# EAGLE board MA_board_2 (EAGLE 9.4.2)
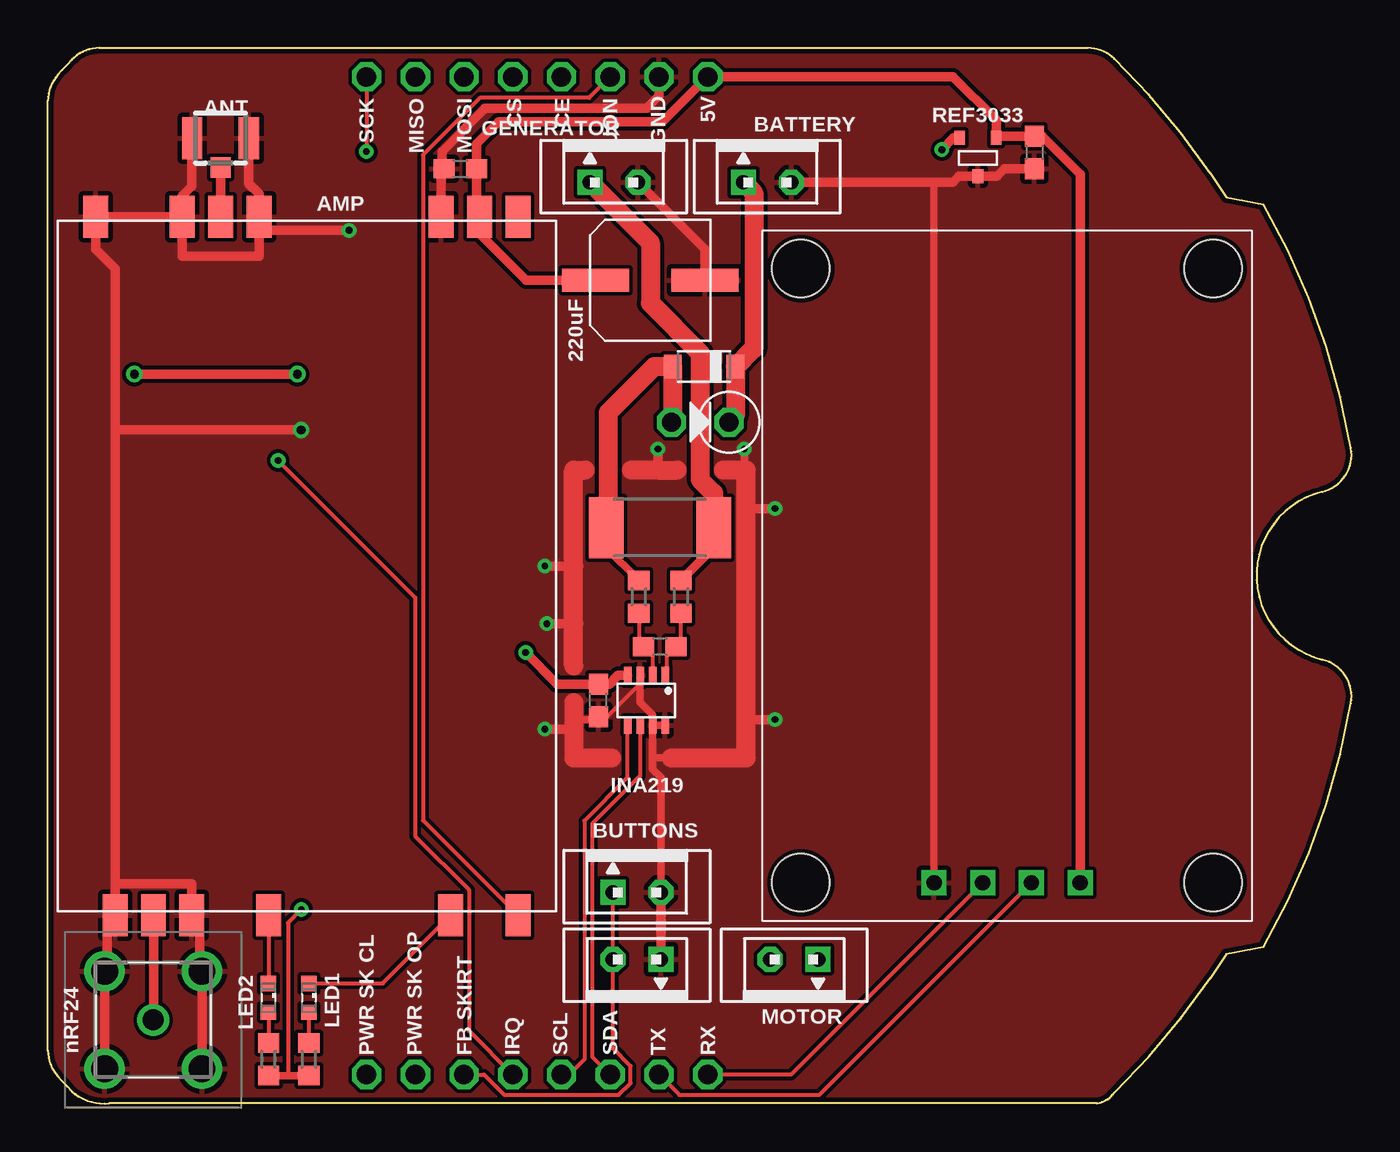
[diagram p0: board, top side]
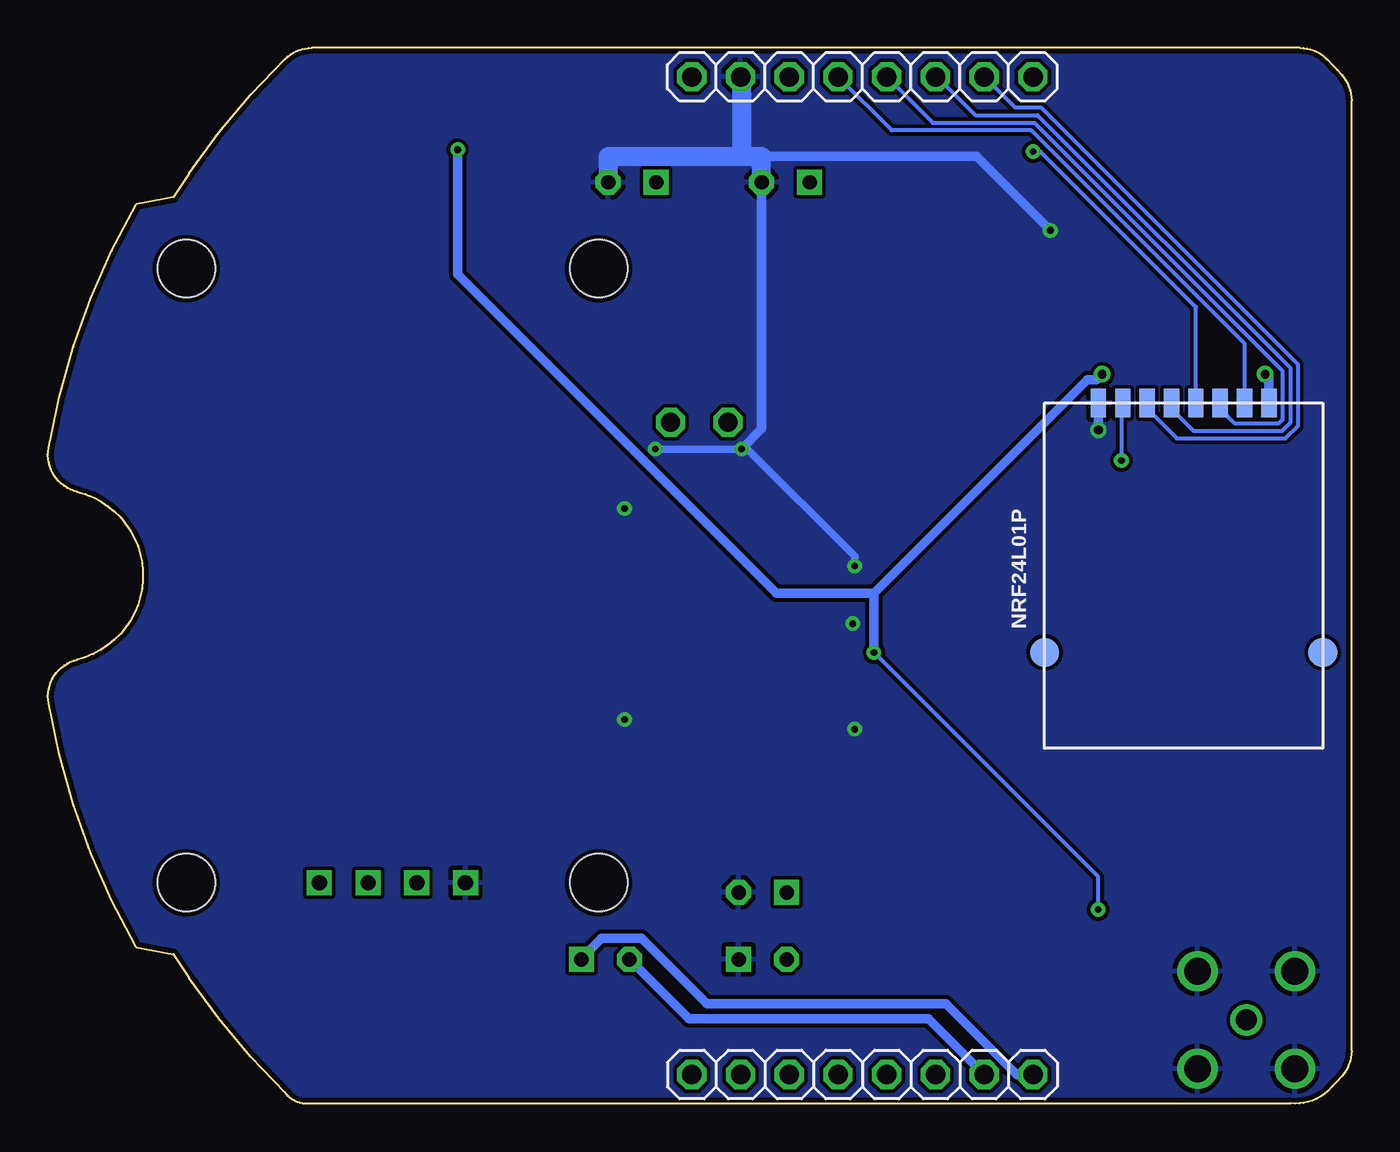
[diagram p1: board, bottom side, seen from below]

Size 67.96 x 55.01 mm. Coordinates in mm from the lower left corner, seen from the top.
Outline: 0,2.76 0,52.27 arc-42 0.51,53.6 arc-2 1.24,54.39 arc-46 2.69,55.01 54.2,55.01 arc-44 55.59,54.45 arc-12 60.59,48.48 61.43,47.24 63.36,46.86 arc-20 67.93,34.17 arc-86 66.43,31.88 arc153 66.43,23.14 arc-86 67.93,20.86 arc-20 63.36,8.16 61.43,7.79 60.59,6.54 arc-12 55.59,0.58 arc-44 54.7,0.01 3.19,0.01 arc-46 1.24,0.63 arc-2 0.51,1.42 arc-42 0,2.76
Copper layers (1*16): Top 0.035mm / dielectric 1.5mm / Bottom 0.035mm
Design rules "default *": minimum track width 0.2mm, minimum drill 0.35mm, track to track 0.2mm, track to pad 0.2mm, pad to pad 0.2mm, via to via 0.2mm, smd to smd 0.2mm, copper to edge 0.25mm, drill to drill 0.2mm, minimum pad ring 10mil, minimum via ring 8mil, stop-mask expansion 4mil, vias tented up to drill 0mil, thermal gap 10mil

## Footprints (pad centres in the part's own frame; a part is rotated, then mirrored left to right if it is on the bottom)
XQ-02A = smd 2.2 x 1.3: P$1 -18.2,-11; P$2 -18.2,-6.5; P$3 -18.2,-4.5; P$4 -18.2,-2.5; P$5 -18.2,9; P$6 -18.2,11; P$7 18.2,11; P$8 18.2,7.5; P$9 18.2,-2; P$10 18.2,-6; P$11 18.2,-8; P$12 18.2,-10; P$13 -18.2,7
B2B-PH-K-S = drill 0.75 pad 1.3 square: 1 1.25,0 | drill 0.75 pad 1.3 octagon: 2 -1.25,0
C0603 = smd 1.1 x 1: 1 -0.85,0; 2 0.85,0
ECAP220-CMD = smd 1.2 x 3.5: P$1 0,2.85; P$2 0,-2.85
SOD123 = smd 0.91 x 1.22: A 1.635,0; C -1.635,0
BA159 = drill 1 octagon: P$1 -1.5,0; P$2 1.5,0
SOT23-8 = smd 0.9 x 0.4: 1 -1.3,0.975; 2 -1.3,0.325; 3 -1.3,-0.325; 4 -1.3,-0.975; 5 1.3,-0.975; 6 1.3,-0.325; 7 1.3,0.325; 8 1.3,0.975
MCXJPHSTTH1 = drill 1.1 pad 1.65: 1 0,0 | drill 1.4 pad 2.1: 2 -2.54,2.54; 3 -2.54,-2.54; 4 2.54,-2.54; 5 2.54,2.54
U.FL-R-SMT-1(10) = smd 1.05 x 2.2: 1 -1.475,0; 2 1.475,0 | smd 1.05 x 1.05: 3 0,1.525
1X08 = drill 1.016 pad 1.524 octagon: 1 -8.89,0; 2 -6.35,0; 3 -3.81,0; 4 -1.27,0; 5 1.27,0; 6 3.81,0; 7 6.35,0; 8 8.89,0
SML0603 = smd 0.8 x 0.8: A 0.75,0; C -0.75,0
NRF24L01_ML01SP4 = smd 1.5 x 0.8: P$1 -9,4.445; P$2 -9,3.175; P$3 -9,1.905; P$4 -9,0.635; P$5 -9,-0.635; P$6 -9,-1.905; P$7 -9,-3.175; P$8 -9,-4.445 | smd 1.5 x 1.5: P$9 4,7.25; P$10 4,-7.25
R0603 = smd 1 x 1.1: 1 -0.85,0; 2 0.85,0
R2512 = smd 1.8 x 3.2: 1 -2.8,0; 2 2.8,0
SOT23-3 = smd 0.56 x 0.73: 1 -0.95,-1; 2 0.95,-1; 3 0,1
GPS = drill 0.8 square: GND -16,3.81; RX -16,-1.27; TX -16,1.27; UCC -16,-3.81 | hole 3: 16,10.75; -16,10.75; -16,-10.75; 16,-10.75

## Placement (x,y rotation side)
AMP  XQ-02A  [XQ-02A]  13.5,28.01 270 top
BATTERY  JST-2-K-S  [B2B-PH-K-S]  37.5,48.01 180 top
BUTTON-OP  JST-2-K-S  [B2B-PH-K-S]  30.7,7.51 0 top
BUTTONS  JST-2-K-S  [B2B-PH-K-S]  30.7,11.01 180 top
C1  100nF  [C0603]  51.42,49.56 270 top
C2  100nF  [C0603]  31.9,23.81 180 top
C3  100nF  [C0603]  28.7,21.01 90 top
C4  220uF  [ECAP220-CMD]  31.4,42.91 90 top
C6  100nF  [C0603]  21.5,48.71 0 top
D1  D-MBR  [SOD123]  34.2,38.41 180 top
DIP-4A  BA159  [BA159]  34,35.51 0 top
GENERATOR  JST-2-K-S  [B2B-PH-K-S]  29.5,48.01 180 top
INA219  INA219AID  [SOT23-8]  31.2,21.01 270 top
J1  MCX-J-P-H-ST-TH1  [MCXJPHSTTH1]  5.49,4.36 0 top
J2  U.FL-R-SMT-1_10_  [U.FL-R-SMT-1(10)]  9,50.31 180 top
JP1  [1X08]  25.5,53.51 180 bottom
JP2  [1X08]  25.5,1.51 0 bottom
LED1  [SML0603]  13.6,5.51 270 top
LED2  [SML0603]  11.5,5.51 270 top
MOTOR  JST-2-K-S  [B2B-PH-K-S]  38.9,7.51 0 top
NRF24L01P  NRF24L01_ML01SP4  [NRF24L01_ML01SP4]  8.75,27.51 270 bottom
R1  100R  [R0603]  33,26.41 270 top
R2  100R  [R0603]  30.8,26.41 270 top
R3  R05  [R2512]  31.9,30.01 180 top
R4  2k  [R0603]  13.6,2.31 270 top
R5  2k  [R0603]  11.5,2.31 270 top
REF3033  REF3033  [SOT23-3]  48.48,49.32 180 top
U$5  GPS  [GPS]  50,27.51 90 top

## Library data of the parts
AMP BATTERY BUTTON-OP BUTTONS C4 DIP-4A GENERATOR INA219 JP1 JP2 MOTOR NRF24L01P REF3033 = NEON-BLADE-2023
C1-C3 C6 = rcl; SPICEPREFIX: C
D1 = NEON-BLADE-2023; AVAILABILITY: Good; DESCRIPTION: Diode Schottky 20V 500mA Surface Mount SOD-123; MF: ON Semiconductor; MP: MBR0520LT1G; PACKAGE: SOD-123-2 ON Semiconductor; PRICE: None; PURCHASE-URL: https://pricing.snapeda.com/search/part/MBR0520LT1G/?ref=eda
J1 = MCX-J-P-H-ST-TH1; ARROW_PART_NUMBER: MCX-J-P-H-ST-TH1; ARROW_PRICE-STOCK: https://www.arrow.com/en/products/mcx-j-p-h-st-th1/samtec?region=nac; DESCRIPTION: Samtec MCXSeries, Through Hole MCX Jack jack, 50 Impedance, Solder Termination, 0 6GHz, Coaxial cable type; HEIGHT: 5.81mm; MANUFACTURER_NAME: SAMTEC; MANUFACTURER_PART_NUMBER: MCX-J-P-H-ST-TH1; MOUSER_PART_NUMBER: 200-MCXJPHSTTH1; MOUSER_PRICE-STOCK: https://www.mouser.co.uk/ProductDetail/Samtec/MCX-J-P-H-ST-TH1?qs=Cqqh%252BS766wnNti0C6DXzpQ%3D%3D
J2 = U.FL-R-SMT-1_10_; ARROW_PART_NUMBER: U.FL-R-SMT-1(10); ARROW_PRICE-STOCK: https://www.arrow.com/en/products/u.fl-r-smt-1-10/hirose-electric; DESCRIPTION: UFL SMT PCB receptable,DC-6GHz Hirose Straight 50 Surface Mount UFL Connector, Receptacle, Solder Termination Coaxial; HEIGHT: mm; MANUFACTURER_NAME: Hirose; MANUFACTURER_PART_NUMBER: U.FL-R-SMT-1(10); MOUSER_PART_NUMBER: 798-U.FL-R-SMT-110; MOUSER_PRICE-STOCK: https://www.mouser.co.uk/ProductDetail/Hirose-Connector/U.FL-R-SMT-110?qs=kL1ClTr6oBoOdtqlGQpQrQ%3D%3D
LED1 LED2 = led
R1-R5 = rcl; SPICEPREFIX: R
U$5 = cansat-lib

## Nets
3V3: C3.2 INA219.4 NRF24L01P.P$1 R4.2 R5.2 REF3033.2
5V: AMP.P$5 C1.1 C4.P$1 C6.2 JP1.8 REF3033.1 U$5.UCC
CE_NRF: JP1.5 NRF24L01P.P$2
CS_NRF: JP1.4 NRF24L01P.P$3
FEEDBACK_SKIRT: BUTTON-OP.2 BUTTONS.1 JP2.6
GND: AMP.P$1 AMP.P$2 AMP.P$4 AMP.P$10 AMP.P$12 AMP.P$13 BATTERY.2 BUTTON-OP.1 BUTTONS.2 C1.2 C3.1 C4.P$2 C6.1 GENERATOR.2 INA219.3 INA219.7 INA219.8 J1.2 J1.3 J1.4 J1.5 J2.1 J2.2 JP1.7 NRF24L01P.P$8 REF3033.3 U$5.GND
GPS_RX: JP2.1 U$5.TX
GPS_TX: JP2.2 U$5.RX
LED1: AMP.P$8 LED1.C
LED2: AMP.P$9 LED2.C
MISO: JP1.2 NRF24L01P.P$6
MOSI: JP1.3 NRF24L01P.P$5
N$1: C2.1 INA219.1 R1.2
N$2: AMP.P$3 J2.3
N$3: AMP.P$11 J1.1
N$4: GENERATOR.1 R1.1 R3.1
N$5: C2.2 INA219.2 R2.2
N$6: BATTERY.1 D1.C DIP-4A.P$2
N$7: LED1.A R4.1
N$8: D1.A DIP-4A.P$1 R2.1 R3.2
N$9: LED2.A R5.1
NRF_IRQ: JP2.5 NRF24L01P.P$7
POWER_SKIRT_CLOSE: JP2.8 MOTOR.1
POWER_SKIRT_OPEN: JP2.7 MOTOR.2
SCK: JP1.1 NRF24L01P.P$4
SCL: INA219.5 JP2.4
SDA: INA219.6 JP2.3
USIL_ON: AMP.P$7 JP1.6

## Tracks (layer width: path | path; a pad name or v marks a point on that pad's centre or on a via)
3V3  (via drill 0.35, 0.45)
  Top 0.2: C3.2 27.9,21.86 | v13.21,10.12 12.51,9.42 12.51,1.47 12.5,1.46
  Top 0.4: R5.2 12.5,1.46 R4.2
  Top 0.5: INA219.4 29.73,22.31 29.27,21.86 27.9,21.86 | v24.9,23.51 26.55,21.86 C3.2 | REF3033.2 47.21,50.32 v46.6,49.71 | v4.5,38.01 v13,38.01
  Bottom 0.2: v13.21,10.12 13.21,11.82 v24.9,23.51
  Bottom 0.5: v46.6,49.71 46.6,43.21 29.98,26.59 24.9,26.59 | NRF24L01P.P$1 4.3,37.82 v4.5,38.01 | v13,38.01 13.3,37.71 13.78,37.71 24.9,26.59 | v24.9,23.51 24.9,26.59
5V
  Top 0.5: U$5.UCC 53.81,48.44 51.84,50.41 C1.1 49.52,50.41 REF3033.1 49.43,51.26 47.18,53.51 JP1.8 32.04,51.16 23.5,51.16 22.35,50.01 C6.2 22.35,46.36 AMP.P$5 22.5,45.33 24.91,42.91 C4.P$1
CE_NRF
  Bottom 0.2: JP1.5 23.97,50.71 16.7,50.71 5.58,39.59 NRF24L01P.P$2
CS_NRF
  Bottom 0.2: JP1.4 21.83,51.11 16.53,51.11 3.6,38.19 3.6,35.64 3.78,35.46 6.1,35.46 6.84,36.21 NRF24L01P.P$3
FEEDBACK_SKIRT
  Top 0.2: JP2.6 22.73,1.51 23.79,0.45 29.75,0.45 30.37,1.07 30.37,1.95 29.45,2.87 BUTTON-OP.2 BUTTONS.1
GND  (via drill 0.35, 0.45)
  Top 0.2: C3.1 29.15,20.16 30.88,21.89 INA219.3 | 11.7,45.51 AMP.P$4
  Top 0.4: INA219.8 INA219.7 | INA219.3 30.88,20.93 31.52,20.28 INA219.7 | BUTTONS.2 31.95,17.01 31.52,17.44 31.52,18.01 | INA219.7 31.52,18.01 | C3.1 28.55,20.01 27.4,20.01 | 36.3,33.01 v36.3,34.11 | 46,48.01 46.19,47.82 U$5.GND | 31.52,18.01 32.5,18.01
  Top 0.5: JP1.7 31.85,52.51 31.2,51.86 22.8,51.86 20.55,49.61 20.55,48.81 C6.1 20.5,48.56 AMP.P$13 | J1.4 J1.5 7.9,7.03 7.9,9.41 AMP.P$10 7.5,11.46 3.5,11.46 | AMP.P$2 AMP.P$1 2.5,44.51 3.5,43.51 3.5,35.11 | C1.2 49.87,48.71 49.48,48.32 REF3033.3 47.48,48.32 47.17,48.01 46,48.01 BATTERY.2 | AMP.P$2 7,44.16 11,44.16 AMP.P$4 11,47.41 10.47,47.94 J2.1 | J2.2 7.5,50.29 7.5,47.81 7,47.31 AMP.P$2 | J1.3 J1.2 3.1,7.05 3.1,9.41 AMP.P$12 3.5,11.46 | v15.7,45.51 11.7,45.51 | 27.4,28.01 v25.9,28.01 | 36.4,31.01 v37.9,31.01 | 31.8,33.01 v31.8,34.11 | 36.4,20.01 v37.9,20.01 | 27.4,19.51 v25.9,19.51 | 3.5,11.46 3.5,35.11 | BUTTONS.2 BUTTON-OP.1 | GENERATOR.2 34.25,44.51 C4.P$2 | 27.4,25.01 v26,25.01 | v13.2,35.11 3.5,35.11
  Top 1: 27.4,20.91 27.4,20.01 27.4,19.51 27.4,18.01 29.4,18.01 | 32.5,18.01 36.4,18.01 36.4,20.01 36.4,31.01 36.4,33.01 36.3,33.01 35.2,33.01 | 27.4,22.81 27.4,25.01 27.4,28.01 27.4,33.01 28,33.01 | 32.8,33.01 31.8,33.01 30.4,33.01
  Bottom 0.4: v25.9,28.01 25.9,28.51 31.5,34.11 v31.8,34.11 v36.3,34.11
  Bottom 0.5: v15.7,45.51 19.55,49.36 30.75,49.36 | GENERATOR.2 30.75,35.16 v31.8,34.11 | NRF24L01P.P$8 v13.2,35.12 v13.2,35.11
  Bottom 1: BATTERY.2 38.75,49.36 31.8,49.36 | JP1.7 31.8,53.46 31.8,49.36 | 31.8,49.36 30.75,49.36 GENERATOR.2
  pour Top: -1,56.51 70.5,56.51 70.5,-3.49 -1,-3.49
  pour Bottom: -3,58.51 -3,-6.29 72.5,-6.29 72.5,58.51
GPS_RX
  Top 0.2: U$5.TX 38.73,1.51 JP2.1
GPS_TX
  Top 0.2: U$5.RX 40.21,0.45 32.91,0.45 JP2.2
LED1
  Top 0.2: AMP.P$8 17.45,6.26 LED1.C
LED2
  Top 0.2: AMP.P$9 LED2.C
MISO
  Bottom 0.2: NRF24L01P.P$6 10.65,36.21 9.11,34.66 3.45,34.66 2.81,35.31 2.81,38.52 16.2,51.91 17.55,51.91 JP1.2
MOSI
  Bottom 0.2: JP1.3 21.61,53.51 19.61,51.51 16.36,51.51 3.21,38.35 3.21,35.47 3.62,35.06 8.24,35.06 9.38,36.21 NRF24L01P.P$5
N$1
  Top 0.2: R1.2 33,24.06 C2.1 32.25,23.31 32.25,22.39 INA219.1
N$2
  Top 0.2: 9,46.01 AMP.P$3
  Top 0.5: J2.3 9,46.01
N$3
  Top 0.5: AMP.P$11 J1.1
N$4
  Top 0.5: R1.1 34.7,28.96 R3.1
  Top 1: R3.1 34.7,31.81 34,32.51 34,39.11 31.4,41.71 31.4,44.86 GENERATOR.1
N$5
  Top 0.2: R2.2 30.8,24.06 C2.2 31.52,23.34 INA219.2
N$6
  Top 1: BATTERY.1 36.8,47.46 36.8,39.31 36.73,39.31 D1.C 35.84,35.85 DIP-4A.P$2
N$7
  Top 0.2: LED1.A R4.1
N$8
  Top 0.4: R2.1 29.1,28.96 R3.2
  Top 1: R3.2 29.2,30.11 29.2,36.01 31.6,38.41 D1.A 32.56,35.58 DIP-4A.P$1
N$9
  Top 0.2: LED2.A R5.1
NRF_IRQ  (via drill 0.35)
  Top 0.2: JP2.5 21.95,3.79 21.95,11.14 19.15,13.94 19.15,26.36 v12,33.51
  Bottom 0.2: NRF24L01P.P$7 12,36.44 v12,33.51
POWER_SKIRT_CLOSE
  Bottom 0.5: JP2.8 17.44,1.51 21.14,5.21 33.61,5.21 37.01,8.61 39.11,8.61 40.15,7.57 MOTOR.1
POWER_SKIRT_OPEN
  Bottom 0.5: MOTOR.2 34.55,4.41 22.05,4.41 JP2.7
SCK  (via drill 0.35)
  Top 0.2: JP1.1 v16.61,49.61 v16.6,49.61
  Bottom 0.2: v16.6,49.61 16.21,49.61 8.12,41.51 NRF24L01P.P$4
SCL
  Top 0.2: INA219.5 30.23,17 27.97,14.75 27.97,2.31 27.17,1.51 JP2.4
SDA
  Top 0.2: INA219.6 30.88,17.09 28.37,14.58 28.37,2.45 JP2.3
USIL_ON
  Top 0.2: JP1.6 28.21,52.41 22.53,52.41 19.55,49.44 19.55,14.76 AMP.P$7

## Text on the board
tPlace: ANT | SCK | MISO | MOSI | CS | CE | UON | GND | 5V | nRF24
tNames: PWR SK CL | PWR SK OP | FB SKIRT | IRQ | SCL | SDA | TX | RX